# Altium PCB PCB7_optoswitch.PcbDoc
Units mm, origin at the board's own origin, x right, y up, seen from the top; angles counter-clockwise.
Board outline 40.5 x 17 mm, 2 copper layers (Top Layer, Bottom Layer); 8 components, 203 nets, 27 pads, 4 vias.
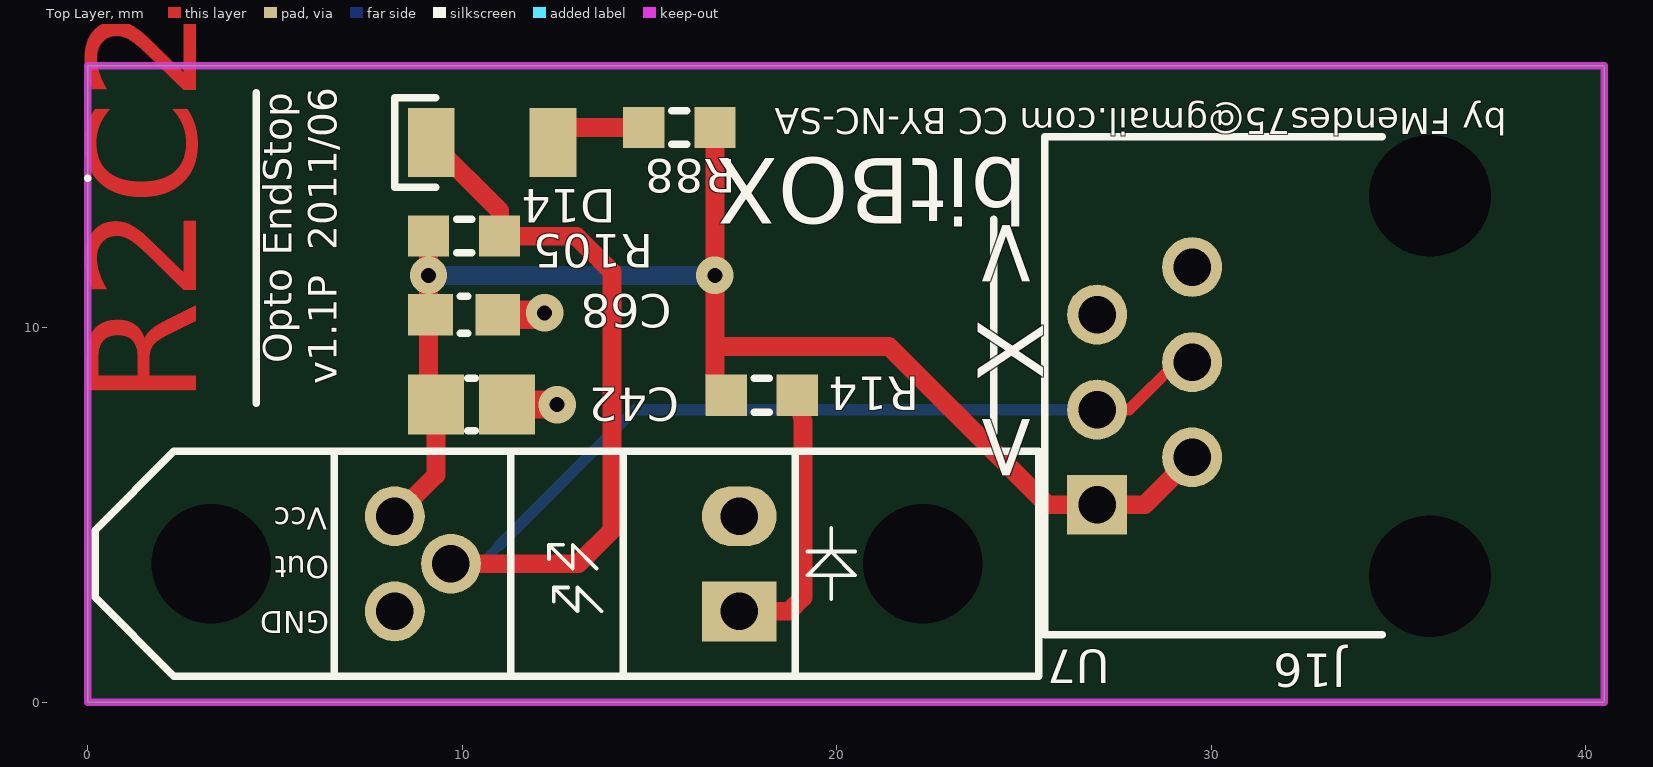
[diagram p0: Top Layer view]
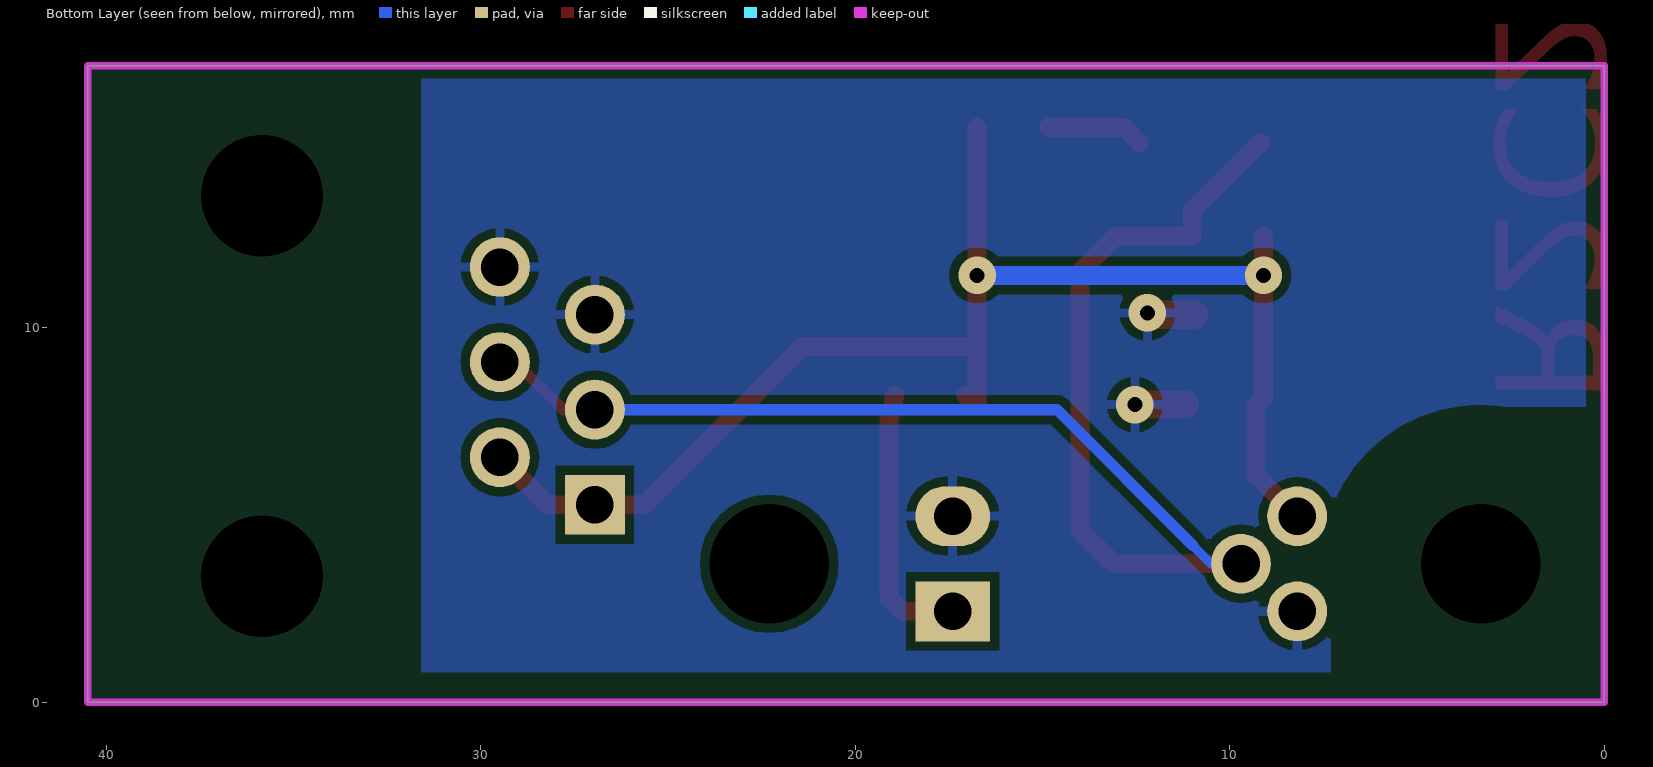
[diagram p1: Bottom Layer view, seen from below]

## Layer stack, top to bottom
Top Layer: signal copper 0.0356
Dielectric: core 0.32, FR-4, Dk 4.8
Bottom Layer: signal copper 0.0356

## Board outline
0,0 40.5,0 40.5,17 0,17

## Design rules (kind name [scope] priority, off if disabled: settings)
AssemblyTestPointUsage [All] p1 off:
AssemblyTestpoint [All] p1 off: testpointundercomponent=TRUE minsize=1.016 maxsize=2.54 preferedsize=1.524 minholesize=0 maxholesize=1.016 preferedholesize=0.813 testpointgrid=0.025 usegrid=TRUE gridtolerance=0 allowsidetop=TRUE allowsidebottom=TRUE
Clearance Clearance_1 [InNamedPolygon('Bottom_GND_USB_exeption') vs InNet('GND')] p1 off: gap=0.25
Clearance Clearance_VMM3 [InNet('NetD15_2') vs InNet('GND')] p2 off: gap=0.6
Clearance Clearance_VMM2 [InNet('NetD16_2') vs InNet('GND')] p3 off: gap=0.6
Clearance Clearance_3 [InNet('USB_D_P') vs (InNet('GND') AND OnLayer('Top Layer') AND (NOT (IsPad AND InNet('GND'))) AND (NOT(InNet('GND') AND IsTrack)))] p4 off: gap=0.76
Clearance Clearance_2 [InNet('USB_D_N') vs (InNet('GND') AND OnLayer('Top Layer') AND (NOT (IsPad AND InNet('GND'))) AND (NOT(InNet('GND') AND IsTrack)))] p5 off: gap=0.76
Clearance Clearance_VMM [InNet('VMM') vs (InNet('GND') AND (NOT (IsVia AND InNet('GND'))))] p6: gap=0.59
Clearance [All] p7: gap=0.24
ComponentClearance [All] p1 off: gap=0.254 collisioncheckmode=3 verticalgap=0.254 showdistances=FALSE
DiffPairsRouting DiffPair_USB2DiffPairsRouting [InDifferentialPair ('USB_D')] p1 off: maxlimit=0.254 minlimit=0.254 mostfreqgap=0.254 maxuncoupledlength=12.7
FabricationTestPointUsage [All] p1 off: valid=0 allowmultiple=FALSE
FabricationTestpoint [All] p1 off: side=3 testpointundercomponent=TRUE minsize=1.016 maxsize=2.54 preferedsize=1.524 minholesize=0 maxholesize=1.016 preferedholesize=0.813 testpointgrid=0.025 allowsidetop=TRUE allowsidebottom=TRUE usegrid=TRUE gridtolerance=0
FanoutControl Fanout_BGA [IsBGA] p1 off: bgadir=Out bgaviamode=Centered fanoutstyle=Auto fanoutdirection=Alternating viagrid=0.025 // Fanout_BGA (Default Rule)
FanoutControl Fanout_LCC [IsLCC] p2 off: bgadir=Out bgaviamode=Centered fanoutstyle=Auto fanoutdirection=Alternating viagrid=0.025 // Fanout_LCC (Default Rule)
FanoutControl Fanout_SOIC [IsSOIC] p3 off: bgadir=Out bgaviamode=Centered fanoutstyle=Auto fanoutdirection=Alternating viagrid=0.025 // Fanout_SOIC (Default Rule)
FanoutControl Fanout_Small [(CompPinCount < 5)] p4 off: bgadir=Out bgaviamode=Centered fanoutstyle=Auto fanoutdirection=OutThenIn viagrid=0.025 // Fanout_Small (Default Rule)
FanoutControl Fanout_Default [All] p5 off: bgadir=Out bgaviamode=Centered fanoutstyle=Auto fanoutdirection=Alternating viagrid=0.025 // Fanout_Default (Default Rule)
Height [All] p1 off: minheight=0 maxheight=30 prefheight=12.7
HoleSize [All] p1 off: absolutevalues=TRUE maxlimit=5.08 minlimit=0.4 maxpercent=80.000 minpercent=20.000
HoleToHoleClearance [All] p1 off: gap=0.254 allowstackedmicrovias=TRUE
LayerPairs [All] p1 off: enforce=TRUE
MatchedLengths DiffPair_USBMatchedLengths [InDifferentialPair ('USB_D')] p1 off: tolerance=2.54 checknetsindiffpair=TRUE checkdiffpairvsdiffpair=TRUE checkothers=TRUE
MaximumViaCount [All] p1 off: limit=300
MinimumAnnularRing [All] p1 off: minimumring=0.3
MinimumSolderMaskSliver [All] p1 off: minsoldermaskwidth=0.254
NetAntennae [All] p1 off: netantennaetolerance=0
NetsToIgnore [(InNet('V3.3') OR InNet('VA3.3') OR InNet('VMM'))] p1 off:
PasteMaskExpansion [All] p1 off: expansion=-0.1
PlaneClearance [All] p1 off: clearance=0.508
PlaneConnect [All] p1 off: planeconnectstyle=Relief reliefexpansion=0.508 reliefentries=4 reliefconductorwidth=0.3 reliefairgap=0.254
PolygonConnect No_Thermal-relif [All vs IsNamedPolygon('Bottom_GND_DCDC')] p1: connectstyle=Direct reliefconductorwidth=0.254 reliefentries=4 polygonreliefangle="90 Angle"
PolygonConnect PolygonConnect_2 [All vs IsNamedPolygon('Bottom_GND_DCDC')] p2 off: connectstyle=Direct reliefconductorwidth=0.254 reliefentries=4 polygonreliefangle="90 Angle"
PolygonConnect PolygonConnect_1 [All vs IsNamedPolygon('Bottom_GND_HeatSink')] p3 off: connectstyle=Direct reliefconductorwidth=0.254 reliefentries=4 polygonreliefangle="90 Angle"
PolygonConnect [All] p4 off: connectstyle=Relief reliefconductorwidth=0.254 reliefentries=4 polygonreliefangle="90 Angle"
RoomDefinition Sheet_1 [InComponentClass('Sheet_1')] p1 off: confinementstyle=ConfineIn formatcopy=TRUE lockcomponents=FALSE outline 44.6,0.7 75,0.7 75,6.2 44.6,6.2
RoomDefinition Sheet_2 [InComponentClass('Sheet_2')] p2 off: confinementstyle=ConfineIn formatcopy=TRUE lockcomponents=FALSE outline 44.8,12.1 75,12.1 75,8.5 44.8,8.5
RoutingCorners [All] p1 off: cornerstyle=45-Degree minsetback=2.54 maxsetback=2.54
RoutingLayers [All] p1 off: top layer_v5=TRUE bottom layer_v5=TRUE
RoutingPriority [All] p1 off: routingpriority=0
RoutingTopology [All] p1 off: topology=Shortest
RoutingVias [All] p1 off: holewidth=0.4 width=1 viastyle="Through Hole" minholewidth=0.4 minwidth=1 maxholewidth=1.6 maxwidth=2
SMDNeckDown [All] p1 off: percent=80.000
ShortCircuit [All] p1 off: allowed=FALSE
SilkToSilkClearance [All] p1 off: silktosilkclearance=0.254
SilkscreenOverComponentPads [All] p1 off: minsilkscreentomaskgap=0.254
SolderMaskExpansion [All] p1 off: expansion=0.1
Width DiffPair_Width [InDifferentialPair('USB_D')] p1 off: maxlimit=0.254 minlimit=0.24 preferedwidth=0.254
Width [All] p2: maxlimit=5 minlimit=0.24 preferedwidth=0.25 checkconnectedcopper=TRUE
1 further rules are at their usual default settings.

## Classes and differential pairs
differential pair USB_D: +USB_D_P -USB_D_N

## Components (designator, comment, footprint, x,y, rotation, side; value= is the part's Value field where it differs from the comment)
C42 "10uF 6.3V" CAPC2012M 10.25,7.95 r180 top
C68 "100nF" CAPC1608M 10.05,10.35 r180 top
D14 "Green" LEDM_3216X12M 10.8,14.95 r0 top
J16 "RJ11" MOLEX_95022-2667 31.4,8.45 r90 top
R14 "680R" RESC1608M 18,8.2 r180 top
R88 "680R" RESC1608M 15.8,15.35 r0 top
R105 "680R" RESC1608M 10.05,12.45 r180 top
U7 "Photo Switch" OPIC_122X50X10 12.8,3.7 r180 top

## Footprints (in the part's own frame and the unit in brackets; to place one, negate y for a bottom-side part, rotate by r counter-clockwise, add the part's x,y. Pads: shape width x height; smd on the part's side, far side on the other; paste and mask are expansions set on the pad)
CAPC1608M [mm] "Chip Capacitor, Body 1.6x0.8mm, IPC Low Density"
  rect 1.2x1.1 smd: 1(-0.9,0) 2(0.9,0)
  silkscreen extent -0.1,-0.5 0.1,0.5, body extent -0.87,-0.48 0.87,0.48, height 0.85
CAPC2012M [mm] "Chip Capacitor, Body 2.0x1.3mm, IPC Low Density"
  rect 1.5x1.6 smd: 1(-0.95,0) 2(0.95,0)
  silkscreen extent -0.1,-0.7 0.1,0.7, body extent -1.1,-0.72 1.1,0.72, height 1.1
LEDM_3216X12M [mm] "Led Chip(1206) 2 Leads, Body 3,2x1,6mm, IPC Low Density"
  rect 1.25x1.85 smd: 1(-1.625,0) 2(1.625,0)
  silkscreen extent -2.6,-1.2 -1.5,1.2, body extent -1.65,-0.85 1.65,0.85, height 1.2
MOLEX_95022-2667 [mm] "Connector; PCB Jack, Thru-Hole; 1-Port, 6 Positions, 6 Loaded; Unshielded without Lightpipes; Vertical"
  rect 1.6x1.6 hole 1: 1(-3.175,4.445)
  round 1.6 hole 1: 2(-1.905,1.905) 3(-0.635,4.445) 4(0.635,1.905) 5(1.905,4.445) 6(3.175,1.905)
  round 2.95 hole 3.25 unplated: MH1(-5.08,-4.445) MH2(5.08,-4.445)
  silkscreen extent -6.65,-3.17 6.65,5.84
OPIC_122X50X10 [mm]
  round 0 hole 3.2 unplated: 0(-9.5,0) 0(9.5,0)
  rect 2x1.6 hole 1: 1(-4.6,1.27)
  oval 2x1.6 hole 1: 2(-4.6,-1.27)
  round 1.6 hole 1: 3(4.6,-1.27) 4(3.1,0) 5(4.6,1.27)
  silkscreen extent -12.6,-3 12.6,3
RESC1608M [mm] "Chip Resistor, Body 1.6x0.8mm, IPC Low Density"
  rect 1.1x1.1 smd: 1(-0.95,0) 2(0.95,0)
  silkscreen extent -0.2,-0.45 0.2,0.45, body extent -0.85,-0.48 0.85,0.48, height 0.6

## Part data
C42: library part 10000001, "Capacitor - MLCC; 0805; Y5V; 10UF; 6.3V"
C68: library part 10000054, "Capacitor - MLCC; 0603; NP0; 50V"
D14: library part 10000008, "Led - 1206; Green OSRAM"
J16: library part 10000062, "Connector - PCB; RJ11; 6/4 Low Profile; Hor."
R14 R88 R105: library part 10000061, "Resistor - 0603; 0.063W; 1%"
U7: library part 10000075, "Opto - Switch; OPIC Sharp; Slotted 3mm; Vcc 5v"

## Via types
v1: diameter 1, hole 0.4, Top Layer to Bottom Layer, 4 vias

## Nets (pads, with @x,y where several pads share a name; then routed paths per layer and width w, separated by ;. In a path a pad name is that pad's centre, name@x,y a point inside that pad or via, vN(x,y) a via of type N, cw(c..) or ccw(c..) an arc to the next point about the centre after c; other vN are vias at no path point)
*BUSB: 
*RST: 
*TRST: 
*USB_PPWR: 
CTC1_NTC1: 
CTC1_NTC2: 
CTC2_NTC1: 
CTC2_NTC2: 
DBG_RXD: 
DBG_TXD: 
E1_MOTOR_1A: 
E1_MOTOR_1B: 
E1_MOTOR_2A: 
E1_MOTOR_2B: 
EXP_AD1_P1.31: 
EXP_AD2_P0.25: 
EXP_AD3_AOUT_P0.26: 
EXP_IO1_P1.15: 
EXP_IO2_P1.0: 
EXP_IO3_P1.9: 
EXP_IO4_P1.10: 
EXP_IO5_P1.14: 
EXP_IO6_P1.1: 
EXP_IO7_P1.4: 
EXP_IO8_P1.8: 
EXP_MISO1_P0.8: 
EXP_MOSI1_P0.9: 
EXP_PWM1_P2.5: 
EXP_PWM2_P2.4: 
EXP_PWM3_FAN_P2.3: 
EXP_PWM4_BUZZER_P2.2: 
EXP_SCK1_P0.7: 
EXP_SSEL1_P0.6: 
GND: 
GND_A: 
ME_DIR: 
ME_EN: 
ME_STEP: 
MN_RST: 
MX_DIR: 
MX_EN: 
MX_STEP: 
MY_DIR: 
MY_EN: 
MY_STEP: 
MZ_DIR: 
MZ_EN: 
MZ_STEP: 
NetC1_1: 
NetC1_2: 
NetC2_1: 
NetC2_2: 
NetC13_1: 
NetC14_1: 
NetC15_2: 
NetC16_2: 
NetC17_2: 
NetC18_1: 
NetC19_1: 
NetC19_2: 
NetC20_1: 
NetC20_2: 
NetC30_1: 
NetC32_1: 
NetC33_2: 
NetC34_2: 
NetC35_2: 
NetC36_2: 
NetC37_2: 
NetC39_2: 
NetC41_1: 
NetC49_1: 
NetC50_1: 
NetC50_2: 
NetC52_1: 
NetC55_1: 
NetC56_1: 
NetC61_1: 
NetC61_2: 
NetC64_2: 
NetC66_1: 
NetD1_1: 
NetD1_2: 
NetD2_1: 
NetD3_1: 
NetD4_1: 
NetD4_2: 
NetD5_1: 
NetD6_1: 
NetD7_1: 
NetD7_2: 
NetD8_1: 
NetD8_2: 
NetD9_1: 
NetD9_2: 
NetD10_1: 
NetD12_2: 
NetD13_2: 
NetD14_2: D14.2 R88.1 | length 2.6
  Top Layer w0.5: D14.2 12.825,15.35 R88.1
NetD15_2: 
NetD16_2: 
NetD17_1: 
NetD18_1: 
NetJ11_1: 
NetJ11_2: 
NetJ11_3: 
NetJ11_4: 
NetJ17_1: 
NetJ17_3: 
NetL9_2: 
NetL10_2: 
NetLS1_1: 
NetLS1_2: 
NetP1_3: 
NetP2_3: 
NetP3_3: 
NetP4_3: 
NetQ1_1: 
NetQ1_3: 
NetQ2_1: 
NetQ2_3: 
NetQ3_1: 
NetQ3_3: 
NetQ4_1: 
NetQ4_3: 
NetQ5_1: 
NetQ6_1: 
NetQ7_1: 
NetQ7_3: 
NetQ8_1: 
NetQ9_1: 
NetQ10_1: 
NetQ11_1: 
NetQ12_1: 
NetQ13_1: 
NetR1_1: 
NetR2_1: 
NetR3_1: 
NetR6_1: 
NetR7_1: 
NetR8_1: 
NetR9_1: 
NetR12_1: 
NetR14_1: R14.1 U7.1 | length 7.3
  Top Layer w0.5: U7.1 18.73,2.43 19.1,2.8 19.1,7.5 R14.1
NetR20_2: 
NetR21_2: 
NetR22_2: 
NetR23_2: 
NetR26_2: 
NetR27_2: 
NetR30_1: 
NetR31_1: 
NetR32_1: 
NetR35_1: 
NetR36_1: 
NetR37_1: 
NetR38_1: 
NetR41_1: 
NetR44_2: 
NetR49_2: 
NetR50_2: 
NetR51_2: 
NetR52_2: 
NetR55_2: 
NetR57_2: 
NetR68_1: 
NetR69_1: 
NetR96_2: 
NetR101_1: 
NetR103_2: 
SD_MISO0: 
SD_MOSI0: 
SD_SCK0: 
SD_SSEL0: 
TCK: 
TDI: 
TDO: 
TMS: 
USB_CONNECT: 
USB_D_N: 
USB_D_P: 
USB_PWR: 
USB_UP_LED: 
USB_VBUS: 
V3.3: 
V5: 
VA3.3: 
VMM: 
X5V: C42.2 C68.2 J16.1 J16.2 R14.2 R88.2 R105.2 U7.3 | length 38.5
  Top Layer w0.5: U7.3 9.3,6.07 C42.2 9.1,8.15 v1(9.1,11.4) R105.2 ; R88.2 v1(16.75,11.4) 16.75,9.5 ; R14.2 16.75,7.95 16.75,9.5 ; J16.2 28.225,5.275 J16.1 25.625,5.275 21.4,9.5 16.75,9.5
  Bottom Layer w0.5: v1(9.1,11.4) v1(16.75,11.4)
X_MOTOR_1A: 
X_MOTOR_1B: 
X_MOTOR_2A: 
X_MOTOR_2B: 
XGND: C42.1 C68.1 J16.5 J16.6 U7.2 U7.5 | length 2.6
  Top Layer w0.75: C68.1 12.15,10.35 v1(12.2,10.4) ; C42.1 v1@12.536,7.95
  other v1: 12.537,7.949
XOUT: D14.1 J16.3 J16.4 R105.1 U7.4 | length 40.2
  Top Layer w0.3: J16.3 27.815,7.815 29.085,9.085 J16.4
  Top Layer w0.5: D14.1 11,13.125 R105.1 13.05,12.45 14,11.5 14,4.6 13.1,3.7 U7.4
  Bottom Layer w0.25: U7.4 10.5,3.7 10.99,4.19
  Bottom Layer w0.3: 10.99,4.19 14.615,7.815 J16.3
Y_MOTOR_1A: 
Y_MOTOR_1B: 
Y_MOTOR_2A: 
Y_MOTOR_2B: 
Z_MOTOR_1A: 
Z_MOTOR_1B: 
Z_MOTOR_2A: 
Z_MOTOR_2B: 
pads on no net: J16.MH1 J16.MH2 U7.0

## Polygon pours and split planes (outlines as drawn)
XGND on Bottom Layer "Bottom_xGND" (solid, pour order 1000): 0.5,16.8 31.6,16.8 31.6,0.8 7.3,0.8 7.3,3.6 3.8,7.9 0.5,7.9

## Keep-outs
Keep-Out Layer:
  the board outline again, w0.2

## Other copper
Top Layer:
  text "R2C2" at 3.855,7.932 h5 r90

## Silkscreen, mask and mechanical layers (free items; w line width, h text height)
Top Overlay:
  lines w0.2: 4.5,7.983 4.5,16.283 ; 24.2,7.2 24.2,12.9 ; 0,14 ccw(c0,14) 0,14
  text "by FMendes75@gmail.com CC BY-NC-SA" at 37.9,16.1 h1.2 r180
  text "bitBOX" at 25.1,15.1 h3 r180
  text "< X >" at 23.2,13 h3 r270
  text "Opto EndStop" at 5.7,9.055 h1.3 r90
  text "v1.1P  2011/06" at 6.9,8.5 h1.3 r90
Mechanical 2:
  text "License		Creative Commons BY-NC-SA" at 0.7,-5.8 h3
Drill Drawing:
  text ".LEGEND" at 36.258,-114.95 h1
  text "Drill Drawing." at 36.258,-117.49 h1

## Dimensions
0,17 to 0,0 on Mechanical 2

## Text inside footprints (layer, text, board x,y; h text height)
U7: Top Overlay "GND" at 6.45,2.633 h1 r180; Top Overlay "Out" at 6.45,4.106 h1 r180; Top Overlay "Vcc" at 6.399,5.402 h1 r180